# Altium PCB COMM_V3.PcbDoc (part 3 of 5)
Units mm, origin at the board's own origin, x right, y up, seen from the top; angles counter-clockwise.
Board outline 93 x 90 mm, 6 copper layers (Top Layer, L2_GND, L3_PWR, L4_SIG, L5_GND, Bottom Layer), stack 1.634 mm thick; 271 components, 237 nets, 1362 pads, 1090 vias.
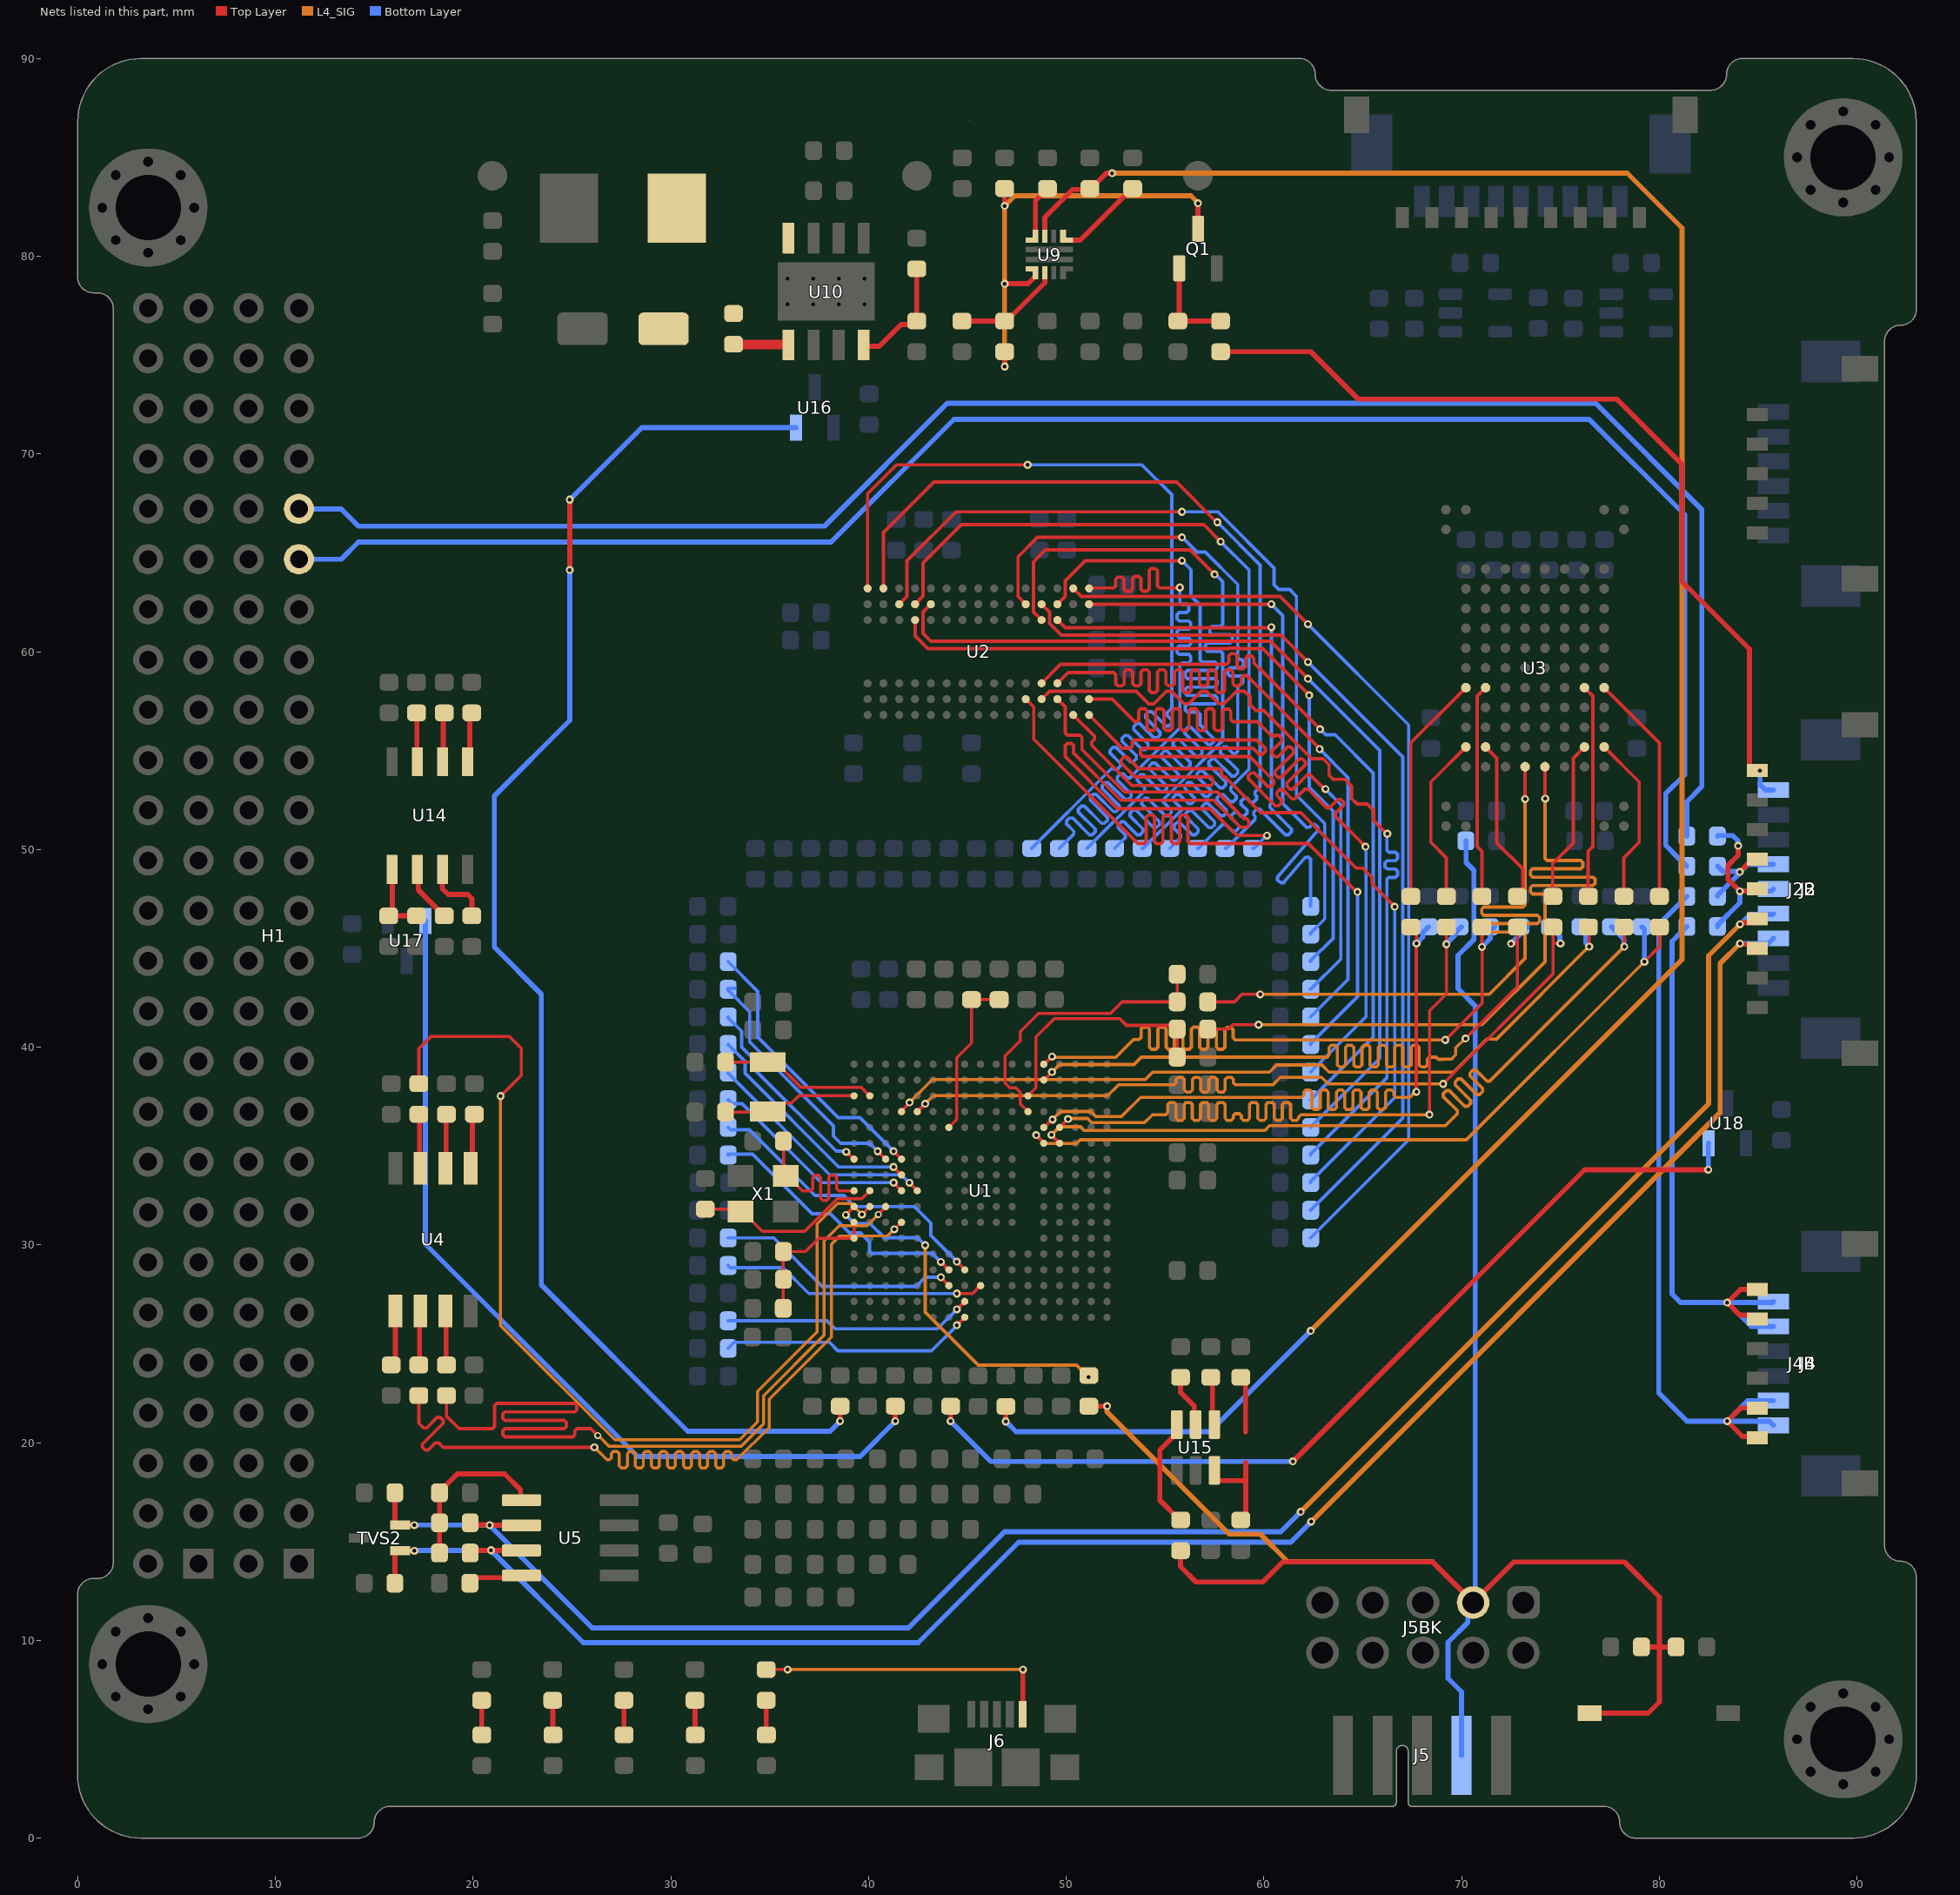
[diagram p7: the nets of this part, all layers, seen from the top]

## Via types
v1: diameter 0.4, hole 0.2, Top Layer to Bottom Layer, tented both sides, 1084 vias
v2: diameter 0.35, hole 0.2, Top Layer to Bottom Layer, tented both sides, 6 vias

## Nets (pads, with @x,y where several pads share a name; then routed paths per layer and width w, separated by ;. In a path a pad name is that pad's centre, name@x,y a point inside that pad or via, vN(x,y) a via of type N, cw(c..) or ccw(c..) an arc to the next point about the centre after c; other vN are vias at no path point) (continued)
MRAM_IO1: R95.1 U1.L4 | length 48.7
  Top Layer w0.152: v1(41.307,30.789) 41.314,30.789 41.663,31.139 U1.L4@41.669,31.139
  Top Layer w0.169: R95.1@17.257,22.379 17.257,21.104 17.257,20.985 17.502,20.74 17.651,20.74 18.192,21.281 18.341,21.281 18.491,21.131 18.491,20.981 17.433,19.923 17.433,19.774 17.582,19.624 17.732,19.624 18.1,19.992 18.249,19.992 18.309,19.932 18.48,19.761 v1(26.137,19.761)
  L4_SIG w0.152: v1(26.137,19.761) 26.771,19.127 26.812,19.127 26.888,19.127 26.989,19.228 26.989,19.45 27.091,19.552 27.294,19.552 27.395,19.45 27.395,18.826 27.497,18.725 27.7,18.725 27.801,18.826 27.801,19.45 27.903,19.552 28.106,19.552 28.207,19.45 28.207,18.826 28.309,18.725 28.512,18.725 28.613,18.826 28.613,19.45 28.715,19.552 28.918,19.552 29.019,19.45 29.019,18.826 29.121,18.725 29.324,18.725 29.425,18.826 29.425,19.45 29.527,19.552 29.73,19.552 29.831,19.45 29.831,18.826 29.933,18.725 30.136,18.725 30.237,18.826 30.237,19.45 30.339,19.552 30.542,19.552 30.643,19.45 30.643,18.826 30.745,18.725 30.948,18.725 31.049,18.826 31.049,19.45 31.151,19.552 31.354,19.552 31.455,19.45 31.455,18.826 31.557,18.725 31.76,18.725 31.861,18.826 31.861,19.45 31.963,19.552 32.166,19.552 32.267,19.45 32.267,18.826 32.369,18.725 32.572,18.725 32.673,18.826 32.673,19.45 32.775,19.552 32.978,19.552 33.079,19.45 33.079,19.228 33.181,19.127 33.334,19.127 34.976,20.77 34.976,22.188 38.133,25.345 38.133,30.036 38.549,30.452 40.97,30.452 v1(41.307,30.789)
MRAM_IO2: R97.1 U1.K3 | length 49.1
  Top Layer w0.152: v2(40.497,31.539) 40.497,31.553 40.869,31.925 U1.K3@40.869,31.939
  Top Layer w0.169: R97.1@18.654,22.379 18.654,21.35 19.296,20.708 20.891,20.708 20.975,20.708 21.081,20.814 21.081,21.237 21.081,21.871 21.187,21.977 25.148,21.977 25.254,21.871 25.254,21.66 25.148,21.554 21.61,21.554 21.504,21.448 21.504,21.237 21.61,21.131 24.62,21.131 24.725,21.025 24.725,20.814 24.62,20.708 21.61,20.708 21.504,20.602 21.504,20.391 21.61,20.285 25.043,20.285 25.148,20.391 25.148,20.602 25.254,20.708 25.339,20.708 25.959,20.708 v2(26.31,20.357)
  L4_SIG w0.152: v2(26.31,20.357) 26.336,20.357 26.887,19.805 33.553,19.805 34.696,20.949 34.696,22.375 37.76,25.438 37.76,30.207 38.524,30.971 39.929,30.971 v2(40.497,31.539)
MRAM_IO3: R96.2 U1.K2 | length 52.4
  Top Layer w0.152: v1(39.669,31.539) U1.K2@40.069,31.939
  Top Layer w0.169: R96.2@17.257,38.153 17.257,39.926 17.869,40.538 21.843,40.538 22.443,39.938 22.443,38.577 v1(21.391,37.525)
  L4_SIG w0.152: v1(21.391,37.525) 21.391,25.919 27.167,20.143 33.484,20.143 34.393,21.052 34.393,22.593 37.403,25.604 37.403,31.053 38.436,32.086 39.122,32.086 v1(39.669,31.539)
NetC35_1: C35.1 R114.1 R115.2 U5.5 | length 8.5
  Top Layer w0.254: R114.1@18.305,14.417 R115.2@18.305,15.941 C35.1@18.305,17.465 18.305,17.515 19.205,18.415 21.6,18.415 22.399,17.616 22.399,17.137 U5.5@22.452,17.084
NetC42_2: C42.2 U9.10 | length 2.7
  Top Layer w0.254: U9.10@48.447,81.013 48.447,82.819 48.706,83.078 48.706,83.082 49.051,83.426 C42.2@49.054,83.426
NetC43_2: C43.2 U9.7 | length 4.8
  Top Layer w0.254: U9.7@49.847,81.013 49.847,80.842 49.87,80.819 50.709,80.819 53.316,83.426 C43.2@53.366,83.426
NetC44_1: C44.1 D1.2 L1.1 U10.8
NetC44_2: C44.2 U10.1 | length 2.8
  Top Layer w0.5: C44.2@33.173,75.552 33.191,75.534 35.935,75.534 U10.1@35.952,75.517
NetC93_2: C93.2 C94.2 FB2.2 U1.L1 U1.M1 | length 7.5
  Top Layer w0.152: FB2.2@35.692,26.794 35.696,26.798 35.696,29.658 C93.2@35.7,29.662 36.811,29.662 37.488,30.339 U1.M1@39.269,30.339 U1.L1@39.269,31.139
NetJ2_3: J2.3 J2B.7 R114.2 R143.1 TVS2.1 U5.7 | length 96.1
  Top Layer w0.254: R143.1@16.047,12.893 16.047,14.427 16.149,14.529 TVS2.1@16.311,14.529 v1(17.03,14.529) ; R114.2@19.855,14.417 19.978,14.54 20.887,14.54 v1(20.906,14.559) 20.913,14.551 22.444,14.551 U5.7@22.452,14.544 ; v1(84.083,45.238) 84.109,45.238 84.143,45.203 84.755,45.203 J2.3@84.958,45
  L4_SIG w0.254: v1(62.393,16.003) 83.081,36.692 83.081,44.236 v1(84.083,45.238)
  Bottom Layer w0.254: v1(17.03,14.529) 17.045,14.544 20.891,14.544 v1(20.906,14.559) 25.578,9.886 42.516,9.886 47.597,14.968 61.358,14.968 v1(62.393,16.003) ; v1(84.083,45.238) 85.507,45.238 J2B.7@85.77,45.5
NetJ2_4: J2.4 J2B.6 R115.1 R142.1 TVS2.2 U5.6 | length 96.4
  Top Layer w0.254: R142.1@16.047,17.465 16.047,15.93 16.149,15.829 TVS2.2@16.311,15.829 v1(17.03,15.829) ; R115.1@19.855,15.941 19.955,15.84 20.82,15.84 v1(20.839,15.822) 20.843,15.818 22.448,15.818 U5.6@22.452,15.814 ; v1(84.083,46.208) 84.109,46.208 84.198,46.297 84.755,46.297 J2.4@84.958,46.5
  L4_SIG w0.254: v1(61.865,16.5) 82.494,37.13 82.494,44.619 v1(84.083,46.208)
  Bottom Layer w0.254: v1(17.03,15.829) 20.832,15.829 v1(20.839,15.822) 26.029,10.631 42.026,10.631 46.889,15.494 60.859,15.494 v1(61.865,16.5) ; v1(84.083,46.208) 84.591,46.717 85.736,46.717 J2B.6@85.77,46.75
NetJ2_5: J2.5 J2B.5 R90.1 R150.2 | length 9.1
  Top Layer w0.254: v1(83.989,50.18) 83.989,49.703 83.469,49.182 83.469,48.492 v1(84.075,47.885) 84.094,47.903 84.861,47.903 J2.5@84.958,48
  Bottom Layer w0.254: R90.1@82.944,46.101 82.944,46.169 84.075,47.3 84.075,47.767 v1(84.075,47.885) 85.655,47.885 J2B.5@85.77,48 ; R150.2@82.944,50.673 82.98,50.709 83.709,50.709 83.971,50.447 83.971,50.198 v1(83.989,50.18)
NetJ2_6: J2.6 J2B.4 R89.1 R148.2 | length 6
  Top Layer w0.254: v1(84.076,48.866) 84.507,49.297 84.755,49.297 J2.6@84.958,49.5
  Bottom Layer w0.254: R89.1@82.944,47.625 82.944,47.678 84.058,48.792 84.058,48.848 v1(84.076,48.866) ; R148.2@82.944,49.149 83.208,48.885 84.058,48.885 v1(84.076,48.866) ; J2B.4@85.767,49.247 84.483,49.247 84.102,48.866 v1(84.076,48.866)
NetJ2_9: J2.9 J2B.1 R88.1 | length 44.5
  Top Layer w0.254: R88.1@57.811,75.171 62.37,75.171 64.77,72.771 77.851,72.771 81.153,69.469 81.153,63.542 84.564,60.13 84.564,54.203 84.792,53.975 v1(85.09,53.975)
  Bottom Layer w0.254: v1(85.09,53.975) 85.096,53.969 85.096,53.273 85.37,53 J2B.1@85.77,53
NetJ6_1: J6.1 R100.2 | length 15.3
  Top Layer w0.152: R100.2@34.826,8.521 v1(35.912,8.521)
  Top Layer w0.254: J6.1@47.8,6.257 47.808,6.265 47.808,8.515 v1(47.815,8.523)
  L4_SIG w0.152: v1(35.912,8.521) v1(35.912,8.521) 47.814,8.522 v1(47.815,8.523)
NetLED1_1: LED1.1 R79.2 | length 1.8
  Top Layer w0.254: R79.2@27.63,6.971 27.637,6.965 27.637,5.226 LED1.1@27.643,5.22
NetLED2_1: LED2.1 R80.2 | length 1.8
  Top Layer w0.254: R80.2@31.228,6.971 31.234,6.965 31.234,5.226 LED2.1@31.241,5.22
NetLED3_1: LED3.1 R119.1 | length 1.9
  Top Layer w0.254: 20.435,6.302 20.441,6.296 ; R119.1@20.441,7.093 20.441,5.226 LED3.1@20.447,5.22
NetLED4_1: LED4.1 R100.1 | length 1.8
  Top Layer w0.254: R100.1@34.826,6.971 34.832,6.965 34.832,5.226 LED4.1@34.838,5.22
NetLED5_1: LED5.1 R121.1 | length 1.9
  Top Layer w0.254: 24.032,6.302 24.039,6.296 ; R121.1@24.039,7.093 24.039,5.226 LED5.1@24.045,5.22
NetQ1_1: Q1.1 R88.2 R91.2 | length 5.1
  Top Layer w0.254: Q1.1@55.718,79.391 55.723,79.387 55.723,76.791 R91.2@55.652,76.721 R88.2@57.811,76.721 R88.2@58.009,76.918
NetQ1_3: Q1.3 R123.2 R124.1 U9.1 | length 23.1
  Top Layer w0.254: R123.2@46.886,83.426 46.888,83.424 46.888,82.552 v1(46.889,82.55) ; v1(46.889,74.422) R124.1@46.889,75.171 ; v1(46.889,78.613) 48.069,78.613 48.424,78.968 48.424,79.143 U9.1@48.447,79.166 ; Q1.3@56.668,81.391 v1(56.668,82.677)
  L4_SIG w0.254: v1(46.889,74.422) v1(46.889,78.613) v1(46.889,82.55) 47.397,83.058 56.313,83.058 56.668,82.703 v1(56.668,82.677)
NetR81_2: R81.2 U1.K1 | length 18.2
  Top Layer w0.169: v1(38.862,31.515) 38.862,31.523 39.269,31.93 U1.K1@39.269,31.939
  L4_SIG w0.169: v1(42.869,29.979) 42.869,26.606 45.552,23.923 50.529,23.923 v1(51.138,23.314)
  Bottom Layer w0.169: v1(38.862,31.515) 39.302,31.075 40.086,31.075 40.796,30.365 42.483,30.365 v1(42.869,29.979)
NetR84_2: R84.2 R86.1 U1.E7 | length 8.3
  Top Layer w0.152: U1.E7@44.069,35.939 44.469,36.339 44.469,39.46 45.212,40.203 R86.1@45.212,42.405 R84.2@46.609,42.405
NetR85_1: R85.1 R126.1 U9.9 | length 117.3
  Top Layer w0.254: v1(46.948,21.07) R85.1@46.948,21.831 ; U9.9@48.923,81.013 48.923,81.967 50.334,83.378 51.15,83.378 R126.1@51.198,83.426 51.257,83.426 52.032,84.201 v1(52.324,84.201)
  L4_SIG w0.254: v1(52.324,84.201) 78.38,84.201 81.153,81.428 81.153,44.437 v1(62.37,25.654)
  Bottom Layer w0.254: v1(46.948,21.07) 47.468,20.55 57.266,20.55 v1(62.37,25.654)
NetR94_2: R94.2 U4.1 | length 2.8
  Top Layer w0.254: R94.2@15.86,23.929 16.067,24.135 U4.1@16.067,26.666
NetR95_2: R95.2 U4.2 | length 2.8
  Top Layer w0.254: R95.2@17.257,23.929 17.297,23.969 17.297,26.626 U4.2@17.337,26.666
NetR96_1: R96.1 U4.7 | length 2.8
  Top Layer w0.254: R96.1@17.257,36.603 17.297,36.563 17.297,33.906 U4.7@17.337,33.866
NetR97_2: R97.2 U4.3 | length 2.8
  Top Layer w0.254: U4.3@18.607,26.666 18.63,26.642 18.63,23.953 R97.2@18.654,23.929
NetR98_1: R98.1 U4.6 | length 2.8
  Top Layer w0.254: U4.6@18.607,33.866 18.63,33.89 18.63,36.579 R98.1@18.654,36.603
NetR99_1: R99.1 U4.5 | length 2.8
  Top Layer w0.254: U4.5@19.877,33.866 19.97,33.96 19.97,36.51 R99.1@20.064,36.603
NetR116_2: R116.2 U5.8 | length 2.8
  Top Layer w0.254: R116.2@19.842,12.893 20.12,13.172 22.349,13.172 U5.8@22.452,13.274
NetR124_2: R124.2 R125.1 U9.2 | length 5.5
  Top Layer w0.254: R125.1@44.73,76.721 R124.2@46.889,76.721 46.985,76.721 48.921,78.656 48.921,79.164 U9.2@48.923,79.166
NetR127_2: R127.2 R128.1 U10.4 | length 5.9
  Top Layer w0.254: U10.4@39.762,75.517 39.831,75.449 40.55,75.449 41.644,76.543 42.266,76.543 R128.1@42.444,76.721 R127.2@42.444,79.362
NetR151_1: R151.1 R154.2 U14.1 | length 3.8
  Top Layer w0.254: U14.1@15.913,48.986 15.913,46.82 R151.1@15.736,46.643 R154.2@17.145,46.643
NetR152_1: R152.1 U14.7 | length 2.5
  Top Layer w0.254: R152.1@17.145,56.904 17.164,56.885 17.164,54.453 U14.7@17.183,54.434
NetR153_1: R153.1 U14.3 | length 3.6
  Top Layer w0.254: U14.3@18.453,48.986 18.453,48.012 18.744,47.721 19.737,47.721 19.939,47.519 19.939,46.739 R153.1@19.843,46.643
NetR155_2: R155.2 U14.6 | length 2.5
  Top Layer w0.254: U14.6@18.453,54.434 18.497,54.479 18.497,56.859 R155.2@18.542,56.904
NetR156_2: R156.2 U14.5 | length 2.6
  Top Layer w0.254: U14.5@19.723,54.434 19.831,54.542 19.831,56.796 R156.2@19.939,56.904
NetR157_2: R157.2 U14.2 | length 2.9
  Top Layer w0.254: U14.2@17.183,48.986 17.226,48.942 17.226,47.956 18.194,46.988 R157.2@18.538,46.643
NetR158_1: R158.1 U15.6 | length 5.7
  Top Layer w0.254: U15.6@55.599,20.914 55.599,20.484 55.431,20.316 55.424,20.316 54.737,19.629 54.737,17.089 55.737,16.089 R158.1@55.787,16.089
NetR159_1: R159.1 U15.5 | length 2.7
  Top Layer w0.254: R159.1@55.787,23.302 55.787,22.548 56.481,21.854 56.481,20.982 U15.5@56.549,20.914
NetR160_1: R160.1 U15.4 | length 2.5
  Top Layer w0.254: R160.1@57.311,23.302 57.405,23.208 57.405,21.008 U15.4@57.499,20.914
NetR161_2: R161.2 SB2.1 | length 2.8
  Top Layer w0.254: R161.2@58.835,23.302 59.072,23.065 59.072,20.551
NetR162_2: R162.2 SB2.2 U15.3 | length 5.1
  Top Layer w0.254: U15.3@57.499,18.604 57.499,18.248 57.667,18.08 58.997,18.08 59.089,17.988 ; R162.2@58.835,16.089 59.089,16.343 59.089,17.988 ; SB2.2@59.089,18.997 59.089,18.08 59.089,17.988
NetR163_1: R163.1 U16.2 | length 74.4
  Top Layer w0.254: v1(24.892,64.135) v1(24.892,67.691) ; v1(38.566,21.082) R163.1@38.566,21.843
  Bottom Layer w0.254: v1(24.892,64.135) 24.892,56.524 21.073,52.705 21.073,45.065 23.458,42.68 23.458,27.977 30.861,20.574 38.058,20.574 v1(38.566,21.082) ; v1(24.892,67.691) 28.538,71.337 U16.2@36.332,71.337
NetR164_1: R164.1 U17.2 | length 46.1
  Top Layer w0.254: v1(41.354,21.082) R164.1@41.354,21.843
  Bottom Layer w0.254: U17.2@17.587,46.392 17.587,30.038 28.321,19.304 39.576,19.304 v1(41.354,21.082)
NetR165_1: R165.1 U18.2 | length 47.4
  Top Layer w0.254: v1(44.154,21.082) R165.1@44.154,21.843 ; v1(61.468,19.05) 76.219,33.801 v1(82.479,33.801)
  Bottom Layer w0.254: v1(44.154,21.082) 46.186,19.05 v1(61.468,19.05) ; v1(82.479,33.801) 82.484,33.806 82.484,35.137 U18.2@82.489,35.142
OBC1_I2C1_SCL: H1.43 R150.1 | length 93
  Bottom Layer w0.254: H1.43@11.19,67.22 13.332,67.22 14.2,66.352 37.777,66.352 43.984,72.559 76.787,72.559 82.158,67.188 82.158,53.177 81.394,52.412 R150.1@81.394,50.673
OBC1_I2C1_SDA: H1.41 R148.1 | length 93.6
  Bottom Layer w0.254: H1.41@11.19,64.68 13.332,64.68 14.2,65.548 38.11,65.548 44.317,71.755 76.454,71.755 81.28,66.929 81.28,53.78 80.323,52.824 80.323,50.208 81.034,49.497 81.05,49.497 81.382,49.164 R148.1@81.382,49.149
OBC2_I2C2_SCL: J4.5 J4.6 J4B.1 J4B.2 R90.2 | length 30.7
  Top Layer w0.254: J4.5@84.958,26.25 84.755,26.453 84.068,26.453 v1(83.439,27.082) 84.107,27.75 J4.6@84.958,27.75
  Bottom Layer w0.254: R90.2@81.394,46.101 81.394,46.097 81.05,45.753 81.046,45.753 80.645,45.352 80.645,27.515 81.072,27.088 v1@83.433,27.088 ; J4B.2@85.773,25.875 84.646,25.875 v1(83.439,27.082) 85.73,27.082 J4B.1@85.773,27.125
OBC2_I2C2_SDA: J4.1 J4.2 J4B.5 J4B.6 R89.2 | length 38.6
  Top Layer w0.254: J4.1@84.958,20.25 84.892,20.316 84.205,20.316 v1(83.439,21.082) 84.107,21.75 J4.2@84.958,21.75
  Bottom Layer w0.254: R89.2@81.394,47.625 81.394,47.621 81.05,47.277 81.046,47.277 79.977,46.208 79.977,22.512 81.407,21.082 v1(83.439,21.082) ; J4B.6@85.773,20.875 85.566,21.082 v1(83.439,21.082) ; J4B.5@85.773,22.125 84.482,22.125 v1(83.439,21.082)
OSC32_IN: C25.2 U1.C2 X2.1 | length 8
  Top Layer w0.152: C25.2@32.775,39.245 X2.1@34.91,39.245 35.31,39.245 36.578,37.976 39.632,37.976 U1.C2@40.069,37.539
OSC32_OUT: C26.2 U1.C1 X2.2 | length 6.8
  Top Layer w0.152: C26.2@32.775,36.722 34.886,36.722 X2.2@34.91,36.745 35.334,37.169 36.101,37.169 36.471,37.539 U1.C1@39.269,37.539
OSCIN: C22.2 U1.J1 X1.3 | length 9.2
  Top Layer w0.152: C22.2@35.7,35.25 35.7,33.604 X1.3@35.821,33.483 35.921,33.483 36.042,33.362 36.665,32.739 37.074,32.739 37.175,32.84 37.175,33.419 37.277,33.521 37.48,33.521 37.581,33.419 37.581,32.351 37.683,32.25 37.886,32.25 37.987,32.351 37.987,33.419 38.089,33.521 38.292,33.521 38.393,33.419 38.393,32.84 38.495,32.739 38.856,32.739 U1.J1@39.269,32.739
OSCOUT: C23.2 U1.J2 X1.1 | length 9.6
  Top Layer w0.152: C23.2@31.75,31.808 33.396,31.808 X1.1@33.521,31.683 33.621,31.683 34.625,30.679 36.775,30.679 38.424,32.328 39.658,32.328 U1.J2@40.069,32.739
RESET#: BT1.2 C24.2 J5.9 J5BK.3 R19.2 R81.1 R87.2 R158.2 | length 110.7
  Top Layer w0.254: R81.1@51.147,21.843 v1(52.07,21.844) ; R158.2@55.787,14.539 55.787,13.732 56.565,12.954 59.944,12.954 60.954,13.964 68.535,13.964 J5BK.3@70.587,11.913 72.638,13.964 78.238,13.964 80.01,12.192 80.01,9.667 ; BT1.2@76.482,6.314 79.43,6.314 80.01,6.894 80.01,9.667 ; R87.2@79.095,9.667 80.01,9.667 ; C24.2@80.847,9.667 80.01,9.667
  L4_SIG w0.254: v1(52.07,21.844) 52.07,21.55 58.253,15.367 59.824,15.367 61.216,13.975 68.524,13.975 J5BK.3@70.587,11.913
  Bottom Layer w0.254: J5.9@70,4.186 70,7.394 69.317,8.078 69.317,9.902 70.319,10.905 70.319,11.645 J5BK.3@70.587,11.913 70.695,12.021 70.695,42.081 69.816,42.96 69.816,44.643 70.621,45.449 70.621,48.943 70.224,49.34 70.224,50.427 R19.2@70.218,50.433
SDIO1_B_CK: R20.2 U3.P6@74.215,54.181 | length 39.6
  Top Layer w0.169: R20.2@57.163,40.917 58.201,40.917 58.42,41.136 v1(59.735,41.136) ; U3.P6@74.215,54.181 74.223,54.173 74.223,52.576 v1(74.231,52.567)
  L4_SIG w0.169: v1(59.735,41.136) 71.041,41.136 74.215,44.31 74.215,44.366 74.215,47.56 74.215,47.645 74.109,47.751 73.591,47.751 73.486,47.856 73.486,48.068 73.591,48.174 76.649,48.174 76.755,48.279 76.755,48.491 76.649,48.597 73.591,48.597 73.486,48.702 73.486,48.914 73.591,49.02 76.037,49.02 76.143,49.125 76.143,49.337 76.037,49.443 74.321,49.443 74.215,49.548 74.215,50.735 74.215,52.551 v1(74.231,52.567)
SDIO1_B_CMD: R21.2 U3.P5@73.215,54.181 | length 36.4
  Top Layer w0.169: R21.2@57.163,42.291 58.513,42.291 58.894,42.672 v1(59.817,42.672) ; v1(73.211,52.547) 73.213,52.549 73.213,54.179 U3.P5@73.215,54.181
  L4_SIG w0.169: v1(59.817,42.672) 71.4,42.672 73.215,44.487 73.215,45.634 73.215,45.718 73.109,45.824 71.126,45.824 71.02,45.93 71.02,46.141 71.126,46.247 73.839,46.247 73.944,46.353 73.944,46.564 73.839,46.67 71.126,46.67 71.02,46.776 71.02,46.987 71.126,47.093 73.109,47.093 73.215,47.199 73.215,47.371 73.215,52.542 v1(73.211,52.547)
SDIO1_B_D0: R9.2 U3.K2@70.215,58.181 | length 11.7
  Top Layer w0.169: R9.2@67.437,47.625 67.437,55.403 U3.K2@70.215,58.181
SDIO1_B_D1: R10.2 U3.N2@70.215,55.181 | length 8.6
  Top Layer w0.169: R10.2@69.233,47.625 69.233,49.576 68.445,50.364 68.445,53.411 U3.N2@70.215,55.181
SDIO1_B_D2: R11.2 U3.K3@71.215,58.181 | length 10.8
  Top Layer w0.169: R11.2@71.029,47.625 71.029,49.907 70.784,50.152 70.784,57.75 U3.K3@71.215,58.181
SDIO1_B_D3: R12.2 U3.N3@71.215,55.181 | length 8.4
  Top Layer w0.169: U3.N3@71.215,55.181 71.784,54.612 71.784,50.325 73.095,49.015 73.095,47.894 R12.2@72.825,47.625
SDIO1_B_D4: R13.2 U3.N8@76.215,55.181 | length 8.2
  Top Layer w0.169: R13.2@74.604,47.625 74.604,49.284 75.646,50.326 ; 75.646,50.326 75.646,54.36 75.646,54.612 U3.N8@76.215,55.181
SDIO1_B_D5: R14.2 U3.K8@76.215,58.181 | length 10.8
  Top Layer w0.169: U3.K8@76.215,58.181 76.646,57.75 ; R14.2@76.4,47.625 76.4,49.907 76.646,50.152 76.646,57.75
SDIO1_B_D6: R15.2 U3.N9@77.215,55.181 | length 8.6
  Top Layer w0.169: U3.N9@77.215,55.181 78.985,53.411 78.985,50.365 78.197,49.576 R15.2@78.197,47.625
SDIO1_B_D7: R16.2 U3.K9@77.215,58.181 | length 11.7
  Top Layer w0.169: U3.K9@77.215,58.181 80.01,55.386 R16.2@80.01,47.625
SDIO1_CK: R18.1 R20.1 U1.C12 | length 12.3
  Top Layer w0.16: U1.C12@48.069,37.539 48.469,37.939 48.469,40.514 49.403,41.448 52.704,41.448 53.052,41.099 55.431,41.099 R20.1@55.613,40.917 R18.1@55.613,39.497
SDIO1_CMD: R21.1 R22.1 U1.D12 | length 15
  Top Layer w0.16: U1.D12@48.069,36.739 47.674,37.134 47.674,37.717 47.451,37.94 47.15,37.94 46.902,38.187 46.902,39.55 47.674,40.322 47.674,40.783 48.6,41.709 52.239,41.709 52.821,42.291 R21.1@55.613,42.291 R22.1@55.613,43.688
SDIO1_D0: R1.1 R9.1 U1.E13 | length 38.5
  Top Layer w0.16: R9.1@67.437,46.075 67.716,45.796 v1@67.716,45.238 ; v1(67.713,37.738) 67.711,37.74 67.711,45.232 v1(67.719,45.24)
  Top Layer w0.169: U1.E13@48.869,35.939 v1@49.269,36.339
  L4_SIG w0.16: v1(49.308,36.339) 49.717,36.748 51.241,36.748 51.489,36.5 52.806,36.5 53.771,37.465 61.833,37.465 61.913,37.465 62.017,37.568 62.017,37.727 62.12,37.831 62.327,37.831 62.431,37.727 62.431,36.945 62.534,36.841 62.741,36.841 62.845,36.945 62.845,37.727 62.948,37.831 63.155,37.831 63.259,37.727 63.259,36.945 63.362,36.841 63.569,36.841 63.673,36.945 63.673,37.727 63.776,37.831 63.983,37.831 64.087,37.727 64.087,36.945 64.19,36.841 64.397,36.841 64.501,36.945 64.501,37.727 64.604,37.831 64.811,37.831 64.915,37.727 64.915,36.945 65.018,36.841 65.225,36.841 65.329,36.945 65.329,37.727 65.432,37.831 65.639,37.831 65.743,37.727 65.743,36.945 65.846,36.841 66.053,36.841 66.157,36.945 66.157,37.727 66.26,37.831 66.467,37.831 66.571,37.727 66.571,37.568 66.674,37.465 66.953,37.465 67.375,37.465 67.648,37.738 v1(67.713,37.738)
  Bottom Layer w0.254: v1@67.719,45.253 68.037,45.571 68.037,45.799 R1.1@68.326,46.088
SDIO1_D1: R2.1 R10.1 U1.E14 | length 41.5
  Top Layer w0.16: v1(68.375,36.584) 68.375,41.84 69.233,42.699 69.233,42.926 69.233,45.206 69.233,45.723 R10.1@69.233,46.075
  Top Layer w0.169: U1.E14@49.669,35.939 v1(50.096,36.366)
  L4_SIG w0.16: v1(50.096,36.366) 50.121,36.391 51.082,36.391 51.29,36.183 53.963,36.183 54.36,36.58 54.954,36.58 55.034,36.58 55.138,36.683 55.138,37.1 55.241,37.203 55.448,37.203 55.552,37.1 55.552,36.4 55.655,36.296 55.862,36.296 55.966,36.4 55.966,37.1 56.069,37.203 56.276,37.203 56.38,37.1 56.38,36.4 56.483,36.296 56.69,36.296 56.794,36.4 56.794,37.1 56.897,37.203 57.104,37.203 57.208,37.1 57.208,36.4 57.311,36.296 57.518,36.296 57.622,36.4 57.622,37.1 57.725,37.203 57.932,37.203 58.036,37.1 58.036,36.4 58.139,36.296 58.346,36.296 58.45,36.4 58.45,36.533 58.553,36.637 58.76,36.637 58.864,36.533 58.864,36.4 58.967,36.296 59.174,36.296 59.278,36.4 59.278,37.1 59.381,37.203 59.588,37.203 59.692,37.1 59.692,36.4 59.795,36.296 60.002,36.296 60.106,36.4 60.106,37.1 60.209,37.203 60.416,37.203 60.52,37.1 60.52,36.4 60.623,36.296 60.83,36.296 60.934,36.4 60.934,37.1 61.037,37.203 61.244,37.203 61.348,37.1 61.348,36.4 61.451,36.296 61.658,36.296 61.762,36.4 61.762,36.476 61.865,36.58 62.12,36.58 68.371,36.58 v1(68.375,36.584)
  Bottom Layer w0.254: v1(69.235,45.206) 69.235,45.232 69.283,45.28 69.283,45.297 69.7,45.714 69.7,45.797 69.991,46.088 R2.1@69.995,46.088
SDIO1_D2: R3.1 R11.1 U1.A13 | length 39.6
  Top Layer w0.16: v1(69.18,40.367) 71.037,42.224 v1@71.037,45.061 ; R11.1@71.029,46.075 71.031,46.073 v1(71.031,45.066)
  Top Layer w0.169: U1.A13@48.869,39.139 48.888,39.139 49.269,39.519 v1(49.288,39.519)
  L4_SIG w0.169: v1(49.288,39.519) 49.321,39.486 52.507,39.486 53.407,40.386 53.6,40.386 53.684,40.386 53.79,40.492 53.79,40.914 53.896,41.02 54.108,41.02 54.214,40.914 54.214,39.999 54.319,39.893 54.531,39.893 54.637,39.999 54.637,40.914 54.743,41.02 54.954,41.02 55.06,40.914 55.06,39.999 55.166,39.893 55.378,39.893 55.484,39.999 55.484,40.914 55.589,41.02 55.801,41.02 55.907,40.914 55.907,39.999 56.013,39.893 56.224,39.893 56.33,39.999 56.33,40.914 56.436,41.02 56.648,41.02 56.754,40.914 56.754,39.999 56.859,39.893 57.071,39.893 57.177,39.999 57.177,40.914 57.283,41.02 57.494,41.02 57.6,40.914 57.6,39.999 57.706,39.893 57.918,39.893 58.024,39.999 58.024,40.881 58.129,40.986 58.341,40.986 58.447,40.881 58.447,40.472 58.553,40.366 59.014,40.366 v1(69.18,40.367)
  Bottom Layer w0.254: v1(71.031,45.066) 71.455,45.49 71.455,45.879 R3.1@71.664,46.088
SDIO1_D3: R4.1 R12.1 U1.B13 | length 42.4
  Top Layer w0.16: U1.B13@48.869,38.339 48.876,38.339 49.278,38.741 v1(49.284,38.741) ; v1(70.202,40.437) 70.206,40.437 72.829,43.06 72.829,45.243 ; v1(72.499,45.237) 72.506,45.243 72.829,45.243 ; R12.1@72.825,46.075 72.829,46.072 72.829,45.243
  L4_SIG w0.152: 69.095,39.387 69.482,39.387 69.709,39.615 69.709,39.969 70.177,40.437 v1(70.202,40.437)
  L4_SIG w0.16: v1(49.284,38.741) 49.666,39.123 53.434,39.123 53.809,39.497 63.119,39.497 63.199,39.497 63.303,39.6 63.303,39.997 63.406,40.1 63.613,40.1 63.717,39.997 63.717,39.1 63.82,38.997 64.027,38.997 64.131,39.1 64.131,39.997 64.234,40.1 64.441,40.1 64.545,39.997 64.545,39.1 64.648,38.997 64.855,38.997 64.959,39.1 64.959,39.997 65.062,40.1 65.269,40.1 65.373,39.997 65.373,39.1 65.476,38.997 65.683,38.997 65.787,39.1 65.787,39.997 65.89,40.1 66.097,40.1 66.201,39.997 66.201,39.1 66.304,38.997 66.511,38.997 66.615,39.1 66.615,39.997 66.718,40.1 66.925,40.1 67.029,39.997 67.029,39.1 67.132,38.997 67.339,38.997 67.443,39.1 67.443,39.997 67.546,40.1 67.753,40.1 67.857,39.997 67.857,39.1 67.96,38.997 68.167,38.997 68.271,39.1 68.271,39.394 68.374,39.497 68.707,39.497 68.818,39.386 69.094,39.386
  Bottom Layer w0.254: v1(72.499,45.237) 72.499,45.243 72.985,45.73 72.985,45.744 73.33,46.088 R4.1@73.333,46.088
SDIO1_D4: R5.1 R13.1 U1.D5 | length 43.4
  Top Layer w0.16: v1(69.066,38.144) 74.622,43.699 74.622,45.243 ; R13.1@74.622,46.075 74.622,45.243 ; v1(75.003,45.243) 74.622,45.243
  Top Layer w0.169: U1.D5@42.469,36.739 v1(42.869,37.139)
  L4_SIG w0.16: v1(42.869,37.139) 43.277,37.547 52.101,37.547 52.646,38.092 55.378,38.092 55.458,38.092 55.561,38.196 55.561,38.37 55.665,38.473 55.872,38.473 55.975,38.37 55.975,37.83 56.079,37.727 56.286,37.727 56.389,37.83 56.389,38.37 56.493,38.473 56.7,38.473 56.803,38.37 56.803,37.83 56.907,37.727 57.114,37.727 57.217,37.83 57.217,38.37 57.321,38.473 57.528,38.473 57.631,38.37 57.631,37.83 57.735,37.727 57.942,37.727 58.045,37.83 58.045,38.37 58.149,38.473 58.356,38.473 58.459,38.37 58.459,38.196 58.563,38.092 58.865,38.092 60.449,38.092 60.83,38.473 62.921,38.473 63.251,38.144 v1(69.066,38.144)
  Bottom Layer w0.254: R5.1@74.495,46.088 74.498,46.088 74.976,45.611 74.976,45.296 75.003,45.269 v1(75.003,45.243)
SDIO1_D5: R6.1 R14.1 U1.D4 | length 40.8
  Top Layer w0.16: R14.1@76.418,46.075 76.454,46.039 v1(76.454,45.085)
  Top Layer w0.169: U1.D4@41.669,36.739 41.669,36.765 42.077,37.173 v1(42.077,37.199)
  L4_SIG w0.16: v1(42.077,37.199) 43.238,38.359 54,38.359 54.375,38.735 60.286,38.735 60.651,39.1 62.937,39.1 63.303,38.735 69.605,38.735 71.274,40.405 71.755,40.405
  L4_SIG w0.169: 71.755,40.405 76.435,45.085 v1(76.454,45.085)
  Bottom Layer w0.254: R6.1@76.037,46.088 76.283,45.842 76.283,45.282 76.454,45.111 v1(76.454,45.085) v1@76.472,45.103
SDIO1_D6: R7.1 R15.1 U1.F14 | length 42.5
  Top Layer w0.16: R15.1@78.214,46.075 78.232,46.057 v1(78.232,45.085)
  Top Layer w0.169: v1(49.255,35.559) 49.255,35.556 49.669,35.142 U1.F14@49.669,35.139
  L4_SIG w0.169: v1(49.255,35.559) 49.676,35.98 50.718,35.98 50.907,35.791 60.047,35.791 60.286,36.03 69.009,36.03 69.177,36.03 69.727,36.58 69.787,36.64 69.787,36.789 69.081,37.495 69.081,37.645 69.23,37.794 69.38,37.794 70.165,37.009 70.315,37.009 70.465,37.158 70.465,37.308 69.677,38.095 69.677,38.245 69.827,38.394 69.976,38.394 70.764,37.607 70.913,37.607 71.063,37.756 71.063,37.906 70.426,38.543 70.426,38.693 70.575,38.842 70.725,38.842 71.282,38.285 71.432,38.285 71.718,38.571 v1(78.232,45.085)
  Bottom Layer w0.254: R7.1@77.579,46.088 77.583,46.088 78.214,45.457 78.214,45.103 v1(78.232,45.085) v1@78.25,45.103
SDIO1_D7: R8.1 R16.1 U1.F13 | length 39.2
  Top Layer w0.16: v1(79.248,44.323) 80.01,45.085 R16.1@80.01,46.075
  Top Layer w0.169: v1(48.482,35.556) 48.482,35.541 48.869,35.154 U1.F13@48.869,35.139
  L4_SIG w0.16: v1(48.482,35.556) 48.908,35.131 50.527,35.131 50.713,35.317 70.242,35.317 v1(79.248,44.323)
  Bottom Layer w0.254: R8.1@79.121,46.088 79.248,45.961 v1(79.248,44.323)
SDRAM_A0: R45.1 U1.G4 | length 14.3
  Top Layer w0.169: v1(41.269,34.739) U1.G4@41.669,34.339
  Bottom Layer w0.169: R45.1@32.906,44.323 34.403,42.826 34.403,40.503 38.463,36.443 39.565,36.443 v1(41.269,34.739)
SDRAM_A1: R43.1 U1.G3 | length 13.1
  Top Layer w0.169: v1(40.469,34.732) 40.473,34.732 40.865,34.339 U1.G3@40.869,34.339
  Bottom Layer w0.169: R43.1@33.259,42.965 32.906,42.965 R43.1@32.906,42.926 32.906,42.876 33.993,41.789 33.993,40.258 38.227,36.024 38.227,35.503 38.588,35.142 40.059,35.142 v1(40.469,34.732)
SDRAM_A2: R41.1 U1.G1 | length 10.1
  Top Layer w0.169: v1(38.876,34.703) 38.89,34.703 39.254,34.339 U1.G1@39.269,34.339
  Bottom Layer w0.169: R41.1@32.906,41.529 32.906,41.479 33.582,40.803 33.582,39.997 34.245,39.333 34.245,38.862 38.369,34.739 38.84,34.739 v1(38.876,34.703)
SDRAM_A3: R39.1 U1.H4 | length 11.8
  Top Layer w0.169: v1(41.269,33.939) U1.H4@41.669,33.539
  Bottom Layer w0.169: R39.1@32.906,40.132 33.76,39.278 33.76,38.674 38.495,33.939 v1(41.269,33.939)
SDRAM_A4: R37.1 U1.J5 | length 12.1
  Top Layer w0.169: v1(42.069,33.139) U1.J5@42.469,32.739
  Bottom Layer w0.169: R37.1@32.906,38.735 32.906,38.678 38.04,33.544 41.664,33.544 v1(42.069,33.139)
SDRAM_A5: R35.1 U1.J4 | length 10.7
  Top Layer w0.169: v1(41.275,33.147) 41.275,33.14 41.669,32.746 U1.J4@41.669,32.739
  Bottom Layer w0.169: R35.1@32.906,37.338 33.095,37.149 33.601,37.149 37.603,33.147 v1(41.275,33.147)
SDRAM_A6: R33.1 U1.R7 | length 12.6
  Top Layer w0.169: v1(43.663,28.363) 43.663,28.354 44.069,27.948 U1.R7@44.069,27.939
  Bottom Layer w0.169: R33.1@32.906,30.353 35.206,30.353 37.655,27.904 42.419,27.904 42.878,28.363 v1(43.663,28.363)
SDRAM_A7: R31.1 U1.P7 | length 13.9
  Top Layer w0.169: v1(43.663,29.136) 43.667,29.136 44.064,28.739 U1.P7@44.069,28.739
  Bottom Layer w0.169: R31.1@32.906,34.544 32.906,34.583 34.142,34.583 37.156,31.569 38.077,31.569 39.041,30.606 39.589,30.606 40.055,30.139 40.055,29.819 40.048,29.812 40.048,29.671 40.147,29.572 43.224,29.572 43.661,29.136 v1(43.663,29.136)
SDRAM_A8: R29.1 U1.P8 | length 15.3
  Top Layer w0.169: v1(44.47,29.152) 44.47,29.145 44.869,28.746 U1.P8@44.869,28.739
  Bottom Layer w0.169: R29.1@32.906,35.941 33.027,35.82 33.974,35.82 37.294,32.5 38.752,32.5 39.312,31.941 42.315,31.941 43.154,31.101 43.154,30.467 v1(44.47,29.152)
SDRAM_A9: R27.1 U1.R9 | length 13.5
  Top Layer w0.169: v1(44.47,27.539) 45.269,27.539 U1.R9@45.669,27.939
  Bottom Layer w0.169: R27.1@32.906,28.956 33.015,28.847 35.677,28.847 36.986,27.539 v1(44.47,27.539)
SDRAM_A10: R25.1 U1.T8 | length 12.7
  Top Layer w0.169: v1(44.469,26.739) U1.T8@44.869,27.139
  Bottom Layer w0.169: R25.1@32.906,26.162 37.905,26.162 38.309,25.758 43.488,25.758 v1(44.469,26.739)
SDRAM_A11: R23.1 U1.U8 | length 13
  Top Layer w0.169: v1(44.47,25.935) 44.47,25.937 44.869,26.337 U1.U8@44.869,26.339
  Bottom Layer w0.169: R23.1@32.906,24.765 33.212,25.071 38.025,25.071 38.454,24.643 43.191,24.643 44.47,25.921 v1(44.47,25.935)
SDRAM_B_D0: R78.1 U2.R8 | length 30.1
  Top Layer w0.169: U2.R8@51.157,62.401 v1(60.38,62.401)
  Bottom Layer w0.169: v1(60.38,62.401) 60.96,61.82 60.96,52.324 62.105,51.179 62.165,51.119 62.314,51.13 62.421,51.252 62.57,51.263 62.73,51.124 62.74,50.975 60.684,48.603 60.694,48.453 60.854,48.315 61.003,48.326 62.108,49.6 62.257,49.61 62.37,49.512 62.37,47.544 R78.1@62.37,47.117
SDRAM_B_D1: R77.1 U2.N7 | length 26.9
  Top Layer w0.169: U2.N7@49.557,61.601 49.948,61.21 60.352,61.21 v1(60.38,61.238)
  Bottom Layer w0.169: R77.1@58.039,50.051 58.089,50.051 59.5,51.462 59.56,51.522 59.56,51.672 59.49,51.741 59.49,51.891 59.64,52.04 59.789,52.04 61.092,50.738 61.242,50.738 61.391,50.887 61.391,51.037 60.308,52.12 60.308,52.27 60.38,52.342 60.38,52.857 v1(60.38,61.238)
SDRAM_B_D2: R76.1 U2.R9 | length 39.7
  Top Layer w0.169: U2.R9@51.157,63.201 51.179,63.224 52.319,63.224 52.403,63.224 52.509,63.329 52.509,63.666 52.615,63.772 52.826,63.772 52.932,63.666 52.932,63.169 53.038,63.063 53.249,63.063 53.355,63.169 53.355,63.7 53.461,63.806 53.672,63.806 53.778,63.7 53.778,63.169 53.884,63.063 54.095,63.063 54.201,63.169 54.201,64.102 54.307,64.208 54.518,64.208 54.624,64.102 54.624,63.329 54.73,63.224 55.731,63.224 v1(55.753,63.246)
  Bottom Layer w0.169: R76.1@49.657,50.051 50.325,50.719 50.385,50.779 50.385,50.928 50.023,51.29 50.023,51.439 50.173,51.589 50.322,51.589 51.175,50.737 51.324,50.737 51.474,50.886 51.474,51.036 50.622,51.888 50.622,52.038 50.771,52.187 50.921,52.187 51.789,51.319 51.939,51.319 52.088,51.468 52.088,51.618 51.22,52.486 51.22,52.636 51.369,52.785 51.519,52.785 52.388,51.917 52.537,51.917 52.687,52.066 52.687,52.216 51.818,53.085 51.818,53.234 51.968,53.384 52.117,53.384 52.986,52.515 53.135,52.515 53.285,52.665 53.285,52.814 52.581,53.518 52.581,53.668 52.73,53.817 52.88,53.817 53.077,53.62 53.226,53.62 53.413,53.807 55.753,56.147 55.753,58.827 55.753,59.334 55.859,59.44 56.198,59.44 56.304,59.546 56.304,59.757 56.198,59.863 55.721,59.863 55.615,59.969 55.615,60.18 55.721,60.286 56.198,60.286 56.304,60.392 56.304,60.603 56.198,60.709 55.721,60.709 55.615,60.815 55.615,61.026 55.721,61.132 56.198,61.132 56.304,61.238 56.304,61.449 56.198,61.555 55.721,61.555 55.615,61.661 55.615,61.872 55.721,61.978 56.093,61.978 56.199,62.084 56.199,62.295 56.093,62.401 55.859,62.401 55.753,62.507 55.753,62.918 v1(55.753,63.246)
SDRAM_B_D3: R75.1 U2.N8 | length 47.1
  Top Layer w0.169: U2.N8@49.557,62.401 49.948,62.793 49.948,63.58 50.97,64.602 v1(55.859,64.602)
  Bottom Layer w0.169: R75.1@51.054,50.051 53.911,52.908 53.971,52.968 53.971,53.118 53.614,53.475 53.614,53.625 53.763,53.775 53.913,53.775 54.778,52.91 54.927,52.91 55.077,53.059 55.077,53.209 54.212,54.074 54.212,54.223 54.361,54.373 54.511,54.373 55.376,53.508 55.525,53.508 55.675,53.658 55.675,53.807 54.81,54.672 54.81,54.821 54.96,54.971 55.109,54.971 55.974,54.106 56.123,54.106 56.273,54.256 56.273,54.405 55.408,55.27 55.408,55.42 55.558,55.569 55.707,55.569 56.572,54.704 56.722,54.704 56.871,54.854 56.871,55.003 56.006,55.868 56.006,56.018 56.156,56.167 56.306,56.167 57.17,55.303 57.32,55.303 57.469,55.452 57.469,55.602 56.769,56.302 56.769,56.716 56.769,56.75 56.769,56.835 56.663,56.941 56.129,56.941 56.024,57.046 56.024,57.258 56.129,57.364 57.536,57.364 57.641,57.469 57.641,57.681 57.536,57.787 56.129,57.787 56.024,57.892 56.024,58.104 56.129,58.21 57.536,58.21 57.641,58.315 57.641,58.527 57.536,58.633 56.129,58.633 56.024,58.738 56.024,58.95 56.129,59.056 57.536,59.056 57.641,59.161 57.641,59.373 57.536,59.479 56.875,59.479 56.769,59.584 56.769,59.878 56.769,62.361 56.314,62.816 56.314,64.147 v1(55.859,64.602)
SDRAM_B_D4: R74.1 U2.P9 | length 47.8
  Top Layer w0.169: U2.P9@50.357,63.201 50.766,62.793 60.83,62.793 v1(62.23,61.393)
  Bottom Layer w0.169: v1(62.23,61.393) 67.327,56.296 67.327,35.31 R74.1@62.37,30.353
SDRAM_B_D5: R73.1 U2.M8 | length 46.7
  Top Layer w0.169: U2.M8@48.757,62.401 49.157,62.002 49.157,61.431 49.756,60.831 60.876,60.831 v1(62.23,59.478)
  Bottom Layer w0.169: v1(62.23,59.478) 67.029,54.679 67.029,36.409 R73.1@62.37,31.75
SDRAM_B_D6: R72.1 U2.M7 | length 40.2
  Top Layer w0.169: U2.M7@48.757,61.601 48.348,62.01 48.348,63.363 48.343,63.368 48.343,64.544 48.95,65.151 56.264,65.151 v1(57.502,63.913)
  Bottom Layer w0.169: R72.1@52.451,50.051 52.927,50.527 52.987,50.587 52.987,50.737 52.629,51.094 52.629,51.244 52.779,51.393 52.928,51.393 53.585,50.737 53.734,50.737 53.884,50.886 53.884,51.036 53.228,51.692 53.228,51.842 53.377,51.991 53.527,51.991 54.416,51.102 54.566,51.102 54.716,51.251 54.716,51.401 53.826,52.291 53.826,52.44 53.975,52.59 54.125,52.59 55.015,51.7 55.164,51.7 55.314,51.849 55.314,51.999 54.931,52.382 54.931,52.531 55.485,53.085 57.912,55.512 57.912,59.828 57.912,59.913 57.806,60.018 57.145,60.018 57.04,60.124 57.04,60.336 57.145,60.441 58.304,60.441 58.409,60.547 58.409,60.759 58.304,60.864 57.375,60.864 57.27,60.97 57.27,61.182 57.375,61.287 57.806,61.287 57.912,61.393 57.912,63.246 57.912,63.543 57.541,63.913 v1(57.502,63.913)
SDRAM_B_D7: R70.1 U2.L8 | length 42.1
  Top Layer w0.169: U2.L8@47.957,62.401 47.566,62.793 47.566,64.805 48.547,65.786 v1(55.859,65.786)
  Bottom Layer w0.169: R70.1@53.848,50.051 53.898,50.051 55.74,51.893 55.8,51.953 55.8,52.102 55.417,52.485 55.417,52.635 55.567,52.784 55.716,52.784 56.189,52.312 56.338,52.312 56.488,52.461 56.488,52.611 56.015,53.083 56.015,53.233 56.165,53.382 56.315,53.382 57.021,52.676 57.171,52.676 57.32,52.825 57.32,52.975 56.614,53.681 56.614,53.831 56.763,53.981 56.913,53.981 57.778,53.116 57.927,53.116 58.077,53.265 58.077,53.415 57.212,54.28 57.212,54.429 57.361,54.579 57.511,54.579 58.376,53.714 58.525,53.714 58.675,53.864 58.675,54.013 57.81,54.878 57.81,55.027 57.96,55.177 58.109,55.177 58.425,54.862 58.574,54.862 58.68,54.967 58.68,56.968 58.68,58.234 58.786,58.339 58.837,58.339 58.943,58.445 58.943,58.657 58.837,58.762 58.288,58.762 58.183,58.868 58.183,59.08 58.288,59.185 58.872,59.185 58.978,59.291 58.978,59.503 58.872,59.608 58.786,59.608 58.68,59.714 58.68,59.799 58.68,63.4 57.042,65.038 56.614,65.038 v1@55.865,65.786
SDRAM_B_D8: R68.1 U2.L2 | length 38.4
  Top Layer w0.169: U2.L2@47.957,57.601 48.356,57.202 48.356,55.575 53.635,50.297 53.858,50.297 53.942,50.297 54.048,50.402 54.048,51.636 54.154,51.742 54.365,51.742 54.471,51.636 54.471,50.394 54.577,50.289 54.788,50.289 54.894,50.394 54.894,51.636 55,51.742 55.211,51.742 55.317,51.636 55.317,50.394 55.423,50.289 55.634,50.289 55.74,50.394 55.74,51.636 55.846,51.742 56.057,51.742 56.163,51.636 56.163,50.402 56.269,50.297 58.183,50.297 62.254,50.297 64.701,47.849 v1(64.735,47.849)
  Bottom Layer w0.169: R68.1@62.37,40.132 62.37,40.182 64.735,42.548 v1(64.735,47.849)
SDRAM_B_D9: R66.1 U2.M3 | length 39.2
  Top Layer w0.169: U2.M3@48.757,58.401 49.712,59.356 58.035,59.356 58.12,59.356 58.225,59.462 58.225,59.794 58.331,59.9 58.543,59.9 58.648,59.794 58.648,59.251 58.754,59.145 58.966,59.145 59.071,59.251 59.071,59.668 59.177,59.774 59.389,59.774 59.494,59.668 59.494,59.429 60.095,58.828 v1(62.845,56.078)
  Bottom Layer w0.169: R66.1@62.37,37.338 65.538,40.506 65.538,53.863 63.608,55.794 63.13,55.794 v1(62.845,56.078)
SDRAM_B_D10: R64.1 U2.M2 | length 43.1
  Top Layer w0.169: U2.M2@48.757,57.601 49.156,58 53.45,58 53.534,58 54.175,57.36 54.429,57.36 55.07,58 55.324,58 55.955,57.369 56.209,57.369 56.84,58 57.094,58 57.725,57.37 57.979,57.37 58.609,58 59.013,58 59.24,57.774 59.302,57.712 59.302,57.318 59.587,57.033 59.98,57.033 62.419,54.594 62.99,54.594 63.301,54.283 63.301,53.75 63.507,53.543 64.096,53.543 64.438,53.201 64.438,52.575 64.718,52.296 65.222,52.296 65.549,51.969 65.549,51.464 66.221,50.792 v1(66.247,50.792)
  Bottom Layer w0.169: R64.1@62.37,34.544 62.37,34.594 66.221,38.445 66.221,47.973 66.221,48.481 66.327,48.586 66.653,48.586 66.758,48.692 66.758,48.904 66.653,49.009 66.237,49.009 66.131,49.115 66.131,49.327 66.237,49.432 66.653,49.432 66.758,49.538 66.758,49.75 66.653,49.855 66.327,49.855 66.221,49.961 66.221,50.397 66.221,50.767 v1(66.247,50.792)
SDRAM_B_D11: R63.1 U2.P1 | length 47.5
  Top Layer w0.169: U2.P1@50.357,56.801 51.377,55.781 51.437,55.721 51.437,55.572 51.287,55.422 51.287,55.273 53.322,53.238 57.321,53.238 57.426,53.344 57.426,53.555 57.321,53.661 53.497,53.661 52.783,54.375 52.783,54.525 52.932,54.675 53.082,54.675 53.672,54.084 57.744,54.084 57.849,53.978 57.849,53.767 57.955,53.661 58.039,53.661 59.846,51.855 61.868,51.855 64.666,49.057 65.004,49.057 65.473,48.587 65.473,48.249 v1(66.618,47.105)
  Bottom Layer w0.169: R63.1@62.37,33.147 62.37,33.197 66.618,37.445 v1(66.618,47.105)
SDRAM_B_D12: R61.1 U2.N2 | length 38.3
  Top Layer w0.169: U2.N2@49.557,57.601 49.953,57.205 49.953,56.394 49.953,55.887 50.059,55.781 50.694,55.781 50.799,55.675 50.799,55.045 52.936,52.909 57.635,52.909 58.995,51.549 59.121,51.549 59.227,51.443 59.227,51.232 59.121,51.126 58.819,51.126 57.459,52.486 52.76,52.486 50.376,54.87 50.376,55.252 50.271,55.358 50.059,55.358 49.953,55.252 49.953,54.695 52.585,52.063 57.284,52.063 58.644,50.703 59.417,50.703 v1(60.159,50.703)
  Bottom Layer w0.169: R61.1@59.436,50.051 59.496,50.051 60.148,50.703 v1(60.159,50.703)
SDRAM_B_D13: R59.1 U2.R1 | length 49.3
  Top Layer w0.169: U2.R1@51.157,56.801 52.84,55.118 53.146,55.118 53.23,55.118 53.336,55.224 53.336,55.435 53.442,55.541 59.639,55.541 60.07,55.109 60.07,54.96 59.921,54.81 59.771,54.81 59.464,55.118 53.865,55.118 53.759,55.012 53.759,54.801 53.865,54.695 59.288,54.695 60.506,53.477 60.506,53.328 60.357,53.178 60.207,53.178 59.511,53.875 59.361,53.875 59.211,53.725 59.211,53.576 60.587,52.2 60.737,52.2 60.886,52.349 60.886,52.499 60.656,52.73 60.656,52.879 60.805,53.029 60.955,53.029 61.428,52.555 61.578,52.555 62.077,53.055 62.227,53.055 62.287,52.995 63.112,52.169 63.172,52.11 63.321,52.11 63.744,52.533 63.894,52.533 64.043,52.383 64.043,52.234 63.62,51.811 63.62,51.661 64.579,50.703 v1(65.14,50.141)
  Bottom Layer w0.169: R59.1@62.37,38.735 65.169,41.534 65.169,50.112 v1(65.14,50.141)
SDRAM_B_D14: R57.1 U2.N3 | length 42.6
  Top Layer w0.169: U2.N3@49.557,58.401 50.1,58.944 51.898,58.944 52.405,58.944 52.511,58.839 52.511,58.377 52.617,58.271 52.828,58.271 52.934,58.377 52.934,58.98 53.04,59.086 53.251,59.086 53.357,58.98 53.357,58.377 53.463,58.271 53.674,58.271 53.78,58.377 53.78,58.98 53.886,59.086 54.097,59.086 54.203,58.98 54.203,58.045 54.309,57.94 54.52,57.94 54.626,58.045 54.626,58.98 54.732,59.086 54.943,59.086 55.049,58.98 55.049,58.377 55.155,58.271 55.366,58.271 55.472,58.377 55.472,58.98 55.578,59.086 55.789,59.086 55.895,58.98 55.895,58.039 56.001,57.933 56.212,57.933 56.318,58.039 56.318,58.98 56.424,59.086 56.635,59.086 56.741,58.98 56.741,58.377 56.847,58.271 57.058,58.271 57.164,58.377 57.164,58.98 57.27,59.086 57.481,59.086 57.587,58.98 57.587,58.039 57.693,57.933 57.904,57.933 58.01,58.039 58.01,58.98 58.116,59.086 58.327,59.086 58.433,58.98 58.433,58.377 58.539,58.271 58.75,58.271 58.856,58.377 58.856,58.687 58.962,58.793 59.129,58.793 59.6,58.321 62.822,55.1 v1(62.822,55.073)
  Bottom Layer w0.169: R57.1@62.37,41.529 64.261,43.42 64.261,53.633 v1(62.822,55.073)
SDRAM_B_D15: R55.1 U2.R2 | length 42.9
  Top Layer w0.169: U2.R2@51.157,57.601 52.328,57.601 53.473,56.457 53.483,56.457 53.568,56.457 53.674,56.562 53.674,57.017 53.779,57.123 53.991,57.123 54.097,57.017 54.097,56.118 54.202,56.013 54.414,56.013 54.52,56.118 54.52,57.017 54.625,57.122 54.837,57.122 54.943,57.017 54.943,56.118 55.048,56.012 55.26,56.012 55.366,56.118 55.366,57.016 55.471,57.122 55.683,57.122 55.789,57.016 55.789,56.117 55.894,56.011 56.106,56.011 56.212,56.117 56.212,57.015 56.317,57.121 56.529,57.121 56.635,57.015 56.635,56.116 56.74,56.011 56.952,56.011 57.058,56.116 57.058,57.015 57.163,57.12 57.375,57.12 57.481,57.015 57.481,56.116 57.586,56.01 57.798,56.01 57.904,56.116 57.904,56.996 58.009,57.101 58.221,57.101 58.327,56.996 58.327,56.562 58.432,56.457 59.672,56.457 60.087,56.042 60.172,55.957 60.343,55.786 60.402,55.727 60.552,55.727 60.6,55.775 60.75,55.775 60.899,55.625 60.899,55.475 60.412,54.988 60.412,54.839 60.561,54.689 60.711,54.689 61.198,55.176 61.348,55.176 61.497,55.027 61.497,54.877 60.568,53.948 60.568,53.798 60.717,53.649 60.867,53.649 61.796,54.578 61.946,54.578 62.095,54.429 62.095,54.279 61.166,53.35 61.166,53.2 61.316,53.051 61.465,53.051 62.197,53.782 62.347,53.782 62.92,53.209 v1@63.107,53.022
  Bottom Layer w0.169: R55.1@62.37,42.926 63.893,44.449 63.893,52.27 v1(63.112,53.051)
SDRAM_B_D16: R52.1 U2.E8 | length 47.7
  Top Layer w0.169: U2.E8@43.157,62.401 42.757,62.002 42.757,60.927 43.16,60.524 60.339,60.524 v1(62.23,58.633)
  Bottom Layer w0.169: v1(62.23,58.633) 65.86,55.002 65.86,39.438 62.37,35.947 R52.1@62.37,35.941
SDRAM_B_D17: R51.1 U2.D7 | length 36.4
  Top Layer w0.169: U2.D7@42.357,61.601 42.357,60.8 42.998,60.159 58.207,60.159 58.219,60.171 58.655,60.171 58.667,60.159 59.936,60.159 v1(62.295,57.8)
  Bottom Layer w0.169: v1(62.295,57.8) 62.295,53.148 63.506,51.937 63.506,45.509 62.37,44.373 R51.1@62.37,44.323
SDRAM_B_D18: R49.1 U2.D8 | length 43.8
  Top Layer w0.169: U2.D8@42.357,62.401 42.766,62.81 42.766,64.493 44.693,66.421 56.962,66.421 v1(57.817,65.566)
  Bottom Layer w0.169: R49.1@55.245,50.051 55.721,50.527 55.781,50.587 55.781,50.737 55.448,51.069 55.448,51.219 55.598,51.368 55.748,51.368 56.379,50.737 56.528,50.737 56.678,50.886 56.678,51.036 56.047,51.667 56.047,51.817 56.196,51.966 56.346,51.966 57.21,51.102 57.36,51.102 57.51,51.251 57.51,51.401 56.879,52.031 56.879,52.181 57.029,52.33 57.178,52.33 57.809,51.7 57.958,51.7 58.108,51.849 58.108,51.999 57.635,52.471 57.635,52.621 57.785,52.77 57.935,52.77 58.296,52.409 58.446,52.409 58.595,52.559 58.595,52.708 58.323,52.98 58.323,53.129 59.248,54.054 59.248,54.596 59.248,64.134 v1(57.817,65.566)
SDRAM_B_D19: R47.1 U2.B9 | length 42.9
  Top Layer w0.169: U2.B9@40.757,63.201 40.757,66.03 43.307,68.58 55.586,68.58 57.619,66.547 v1(57.652,66.547)
  Bottom Layer w0.169: R47.1@56.642,50.051 56.692,50.051 57.555,50.914 57.914,51.273 58.063,51.273 58.421,50.915 58.571,50.915 58.72,51.065 58.72,51.214 58.363,51.572 58.363,51.722 58.512,51.871 58.662,51.871 58.846,51.686 58.996,51.686 59.146,51.836 59.146,51.985 58.85,52.281 58.85,52.431 58.999,52.58 59.149,52.58 59.334,52.395 59.484,52.395 59.633,52.545 59.633,52.694 59.559,52.768 59.559,52.918 59.817,53.176 59.817,64.382 v1(57.652,66.547)
SDRAM_B_D20: R46.1 U2.C8 | length 43.3
  Top Layer w0.169: U2.C8@41.557,62.401 41.948,62.793 41.948,64.595 44.427,67.075 v1(55.859,67.075)
  Bottom Layer w0.169: v1(55.859,67.075) 57.671,67.075 60.517,64.228 60.517,63.388 60.755,63.15 61.299,63.15 61.65,62.799 61.65,52.738 63.08,51.308 63.08,48.553 63.08,46.48 62.37,45.77 R46.1@62.37,45.72
SDRAM_B_D21: R44.1 U2.A9 | length 51.4
  Top Layer w0.169: U2.A9@39.957,63.201 39.957,67.986 41.423,69.452 v1(48.049,69.452)
  Bottom Layer w0.169: v1(48.049,69.452) 53.83,69.452 55.344,67.938 55.344,57.143 55.175,56.974 55.115,56.914 55.115,56.764 55.345,56.535 55.345,56.385 55.195,56.236 55.045,56.236 54.319,56.962 54.17,56.962 54.02,56.812 54.02,56.663 54.746,55.936 54.746,55.787 54.597,55.637 54.447,55.637 53.721,56.364 53.571,56.364 53.422,56.214 53.422,56.065 54.148,55.338 54.148,55.189 53.999,55.039 53.849,55.039 53.123,55.765 52.973,55.765 52.824,55.616 52.824,55.466 53.55,54.74 53.55,54.59 53.4,54.441 53.251,54.441 52.524,55.167 52.375,55.167 52.225,55.018 52.225,54.868 52.737,54.356 52.737,54.207 52.587,54.057 52.438,54.057 52.423,54.072 52.274,54.072 51.965,53.764 48.26,50.059 R44.1@48.26,50.051